# Altium PCB Board.PcbDoc
Units mm, origin at the board's own origin, x right, y up, seen from the top; angles counter-clockwise.
Board outline 9.99 x 10 mm, 2 copper layers (Top Layer, Bottom Layer), stack 1.271 mm thick; 8 components, 17 nets, 58 pads, 19 vias.
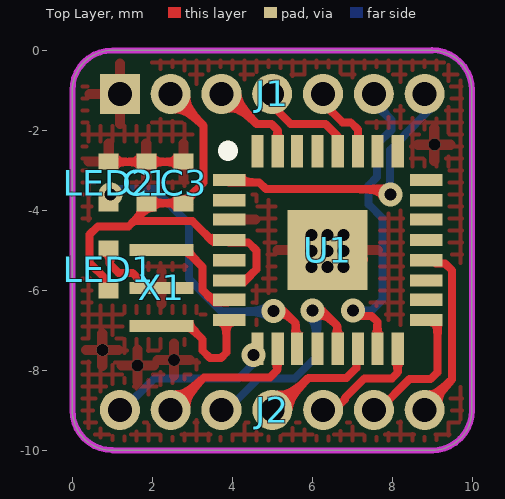
[diagram p0: Top Layer view]
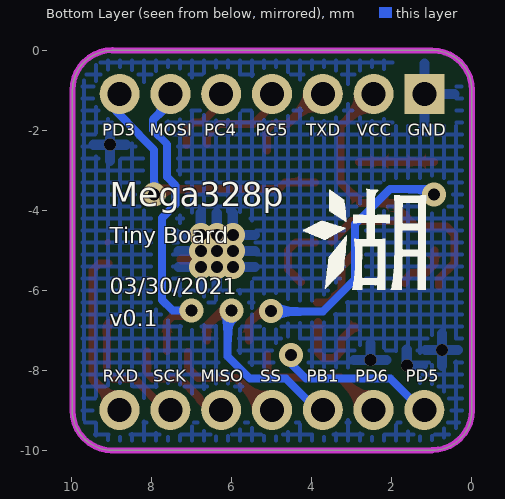
[diagram p1: Bottom Layer view, seen from below]

## Layer stack, top to bottom
Top Solder: solder mask 0.0102, Solder Resist, Dk 3.5
Top Layer: signal copper 0.0356
Dielectric 1: dielectric 1.2, FR-4, Dk 4.8
Bottom Layer: signal copper 0.0356
Bottom Solder: solder mask 0.0102, Solder Resist, Dk 3.5

## Board outline
1.001,-10.003 cw(c1.001,-9.003) 0.001,-9.003 0,-9.007 0,-1.013 0,-1 cw(c1,-1) 1,0 0.985,0 8.969,0 8.989,-0.001 cw(c8.989,-1.001) 9.989,-1.001 9.99,-1.012 9.99,-9.007 9.991,-8.999 cw(c8.991,-8.999) 8.991,-9.999 9.003,-10

## Design rules (kind name [scope] priority, off if disabled: settings)
Clearance [All] p1: gap=0.127 ignorepadtopadclearanceinfootprint=TRUE
HoleToHoleClearance [All] p1: gap=0.1 allowstackedmicrovias=TRUE
MinimumSolderMaskSliver [All] p1 off: minsoldermaskwidth=0.089
PolygonConnect [All] p1: connectstyle=Relief reliefconductorwidth=0.254 reliefentries=4 polygonreliefangle="90 Angle" airgapwidth=0.254
RoutingVias [All] p1: holewidth=0.711 width=1.27 viastyle="Through Hole" minholewidth=0.15 minwidth=0.328 maxholewidth=6.5 maxwidth=1.27
SilkToSolderMaskClearance [IsPad] p1 off: minsilkscreentomaskgap=0.254 clearancetoexposedcopper=TRUE
SolderMaskExpansion [All] p1: expansion=0.102
Width [All] p1: maxlimit=0.5 minlimit=0.102 preferedwidth=0.102 minimp=50.000000 maximp=50.000000 favimp=50.000000
27 further rules are at their usual default settings.

## Components (designator, comment, footprint, x,y, rotation, side; value= is the part's Value field where it differs from the comment)
C1 "100pF" C0402 1.85,-2.78 r270 top
C3 "100pF" C0402 2.78,-2.78 r270 top
J1 "BoardPinsLeft" CONNECTOR7G 1.188,-1.09 r0 top locked
J2 "BoardPinsRight" CONNECTOR7 8.81,-8.99 r180 top locked
LED1 "LED" LED0402 0.92,-6.005 r90 top
LED2 "LED" LED0402 0.92,-3.83 r90 top
U1 "Atmega328p" ATMEGA328P 3.888,-2.501 r0 top
X1 "16Mhz" CSTCE16M0V53-RO 2.23,-4.99 r270 top

## Footprints (in the part's own frame and the unit in brackets; to place one, negate y for a bottom-side part, rotate by r counter-clockwise, add the part's x,y. Pads: shape width x height; smd on the part's side, far side on the other; paste and mask are expansions set on the pad)
ATMEGA328P [mil]
  rect 32x12 smd: 1(1.19,-29.07) 2(1.19,-49.07) 3(1.19,-68.07) 4(1.19,-88.07) 5(1.19,-108.07) 6(1.19,-128.07) 7(1.19,-147.07) 8(1.19,-167.07) 17(195.19,-167.07) 18(195.19,-147.07) 19(195.19,-128.07) 20(195.19,-108.07) 21(195.19,-88.07) 22(195.19,-68.07) 23(195.19,-49.07) 24(195.19,-29.07)
  rect 12x32 smd: 9(29.19,-195.07) 10(49.19,-195.07) 11(68.19,-195.07) 12(88.19,-195.07) 13(108.19,-195.07) 14(128.19,-195.07) 15(147.19,-195.07) 16(167.19,-195.07) 25(167.19,-1.07) 26(147.19,-1.07) 27(128.19,-1.07) 28(108.19,-1.07) 29(88.19,-1.07) 30(68.19,-1.07) 31(49.19,-1.07) 32(29.19,-1.07)
  rect 78.74x78.74 smd: 33(98.19,-98.07)
  silkscreen extent 0,0 0,0, body extent 3,-198 200,-2, height 40
C0402 [mm]
  rect 0.4x0.5 smd: 1(0,0) 2(1.05,0)
  body extent 0,-0.47 1.04,0.27, height 1.2
CONNECTOR7 [mm]
  round 1 hole 0.6: 1(0,0) 2(1.27,0) 3(2.54,0) 4(3.81,0) 5(5.08,0) 6(6.35,0) 7(7.62,0)
  body extent -0.6,-0.58 8.22,0.59, height 0.77
CONNECTOR7G [mm]
  rect 1x1 hole 0.6: 1(0,0)
  round 1 hole 0.6: 2(1.27,0) 3(2.54,0) 4(3.81,0) 5(5.08,0) 6(6.35,0) 7(7.62,0)
  body extent -0.6,-0.58 8.22,0.59, height 0.77
CSTCE16M0V53-RO [mm]
  rect 0.3x1.6 smd: 1(0,0) 2(1.9,0) ""(0.95,0)
  body extent -0.65,-0.69 2.55,0.66, height 1.01
LED0402 [mm]
  rect 0.4x0.5 smd: 1(0,0.01) 2(1.05,0.01)
  body extent 0,-0.26 1.04,0.28, height 0.4

## Part data
C1 C3: library part Capacitor
X1: library part Crystal

## Via types
v1: diameter 0.6, hole 0.3, Top Layer to Bottom Layer, tented both sides, 15 vias
v2: diameter 0.3, hole 0.3, Top Layer to Bottom Layer, tented both sides, 4 vias

## Nets (pads, with @x,y where several pads share a name; then routed paths per layer and width w, separated by ;. In a path a pad name is that pad's centre, name@x,y a point inside that pad or via, vN(x,y) a via of type N, cw(c..) or ccw(c..) an arc to the next point about the centre after c; other vN are vias at no path point)
GND: C1.1 C3.1 J1.1 LED1.2 LED2.2 U1.3 U1.33 X1. | length 3.5
  Top Layer w0.2: LED1.2@0.94,-5 0.94,-5.35 1.16,-5.57 1.51,-5.57 1.67,-5.73 X1.@1.67,-5.82 ; LED2.2@0.95,-2.79 C3.1@2.82,-2.79
  Top Layer w0.25: U1.33@6.994,-5.232 U1.33@7.263,-5.232
  other v1: 5.98,-5.42 6.38,-5.42 6.78,-5.42 5.98,-5.02 6.38,-5.02 6.78,-5.02 5.98,-4.62 6.38,-4.62 6.78,-4.62
  other v2: 1.63,-7.88 2.54,-7.74 0.75,-7.49 9.05,-2.36
MISO: J2.3 U1.16 | length 2.5
  Top Layer w0.2: J2.3@6.53,-8.99 6.55,-8.99 6.813,-8.727 6.813,-8.689 7.302,-8.2 7.99,-8.2 8.13,-8.06 U1.16@8.13,-7.53
MOSI: J1.6 U1.15 | length 7.6
  Top Layer w0.2: v1@7.015,-6.5 7.155,-6.64 7.48,-6.64 7.627,-6.787 U1.15 U1.15@7.627,-7.516
  Bottom Layer w0.2: v1@7.11,-6.52 7.13,-6.5 7.49,-6.5 7.75,-6.24 7.75,-4.19 7.41,-3.85 7.41,-3.38 7.62,-3.17 7.62,-2.35 7.98,-1.99 7.98,-1.74 J1.6@7.64,-1.4
  other v1: 7.015,-6.509
PB1: J2.5 U1.13 | length 4.9
  Top Layer w0.2: v1@6.25,-6.51 6.62,-6.88 U1.13@6.62,-7.25
  Bottom Layer w0.2: J2.5@4,-9.02 4,-8.86 4.65,-8.21 5.55,-8.21 6.11,-7.65 6.11,-6.47 v1@6.12,-6.46 ; v1@6.1,-6.48 v1@6.1,-6.47
  other v1: 6.008,-6.509
PC4: J1.5 U1.27 | length 1.5
  Top Layer w0.2: J1.5@6.26,-1.33 6.282,-1.33 6.752,-1.8 6.96,-1.8 7.14,-1.98 U1.27@7.14,-2.37
PC5: J1.4 U1.28 | length 2.3
  Top Layer w0.2: J1.4@4.98,-1.24 4.98,-1.36 5.46,-1.84 6.33,-1.84 6.63,-2.14 U1.28@6.63,-2.34
PD3: J1.7 U1.1 | length 6.5
  Top Layer w0.2: U1.1@3.918,-3.299 4.669,-3.299 4.84,-3.47 7.72,-3.47 v1@7.83,-3.58
  Bottom Layer w0.2: v1@7.92,-3.58 7.94,-3.56 7.94,-3.312 7.947,-3.305 7.947,-2.485 8.307,-2.125 8.307,-2.113 J1.7@8.9,-1.52
  other v1: 7.95,-3.6
PD5: J2.7 U1.9 | length 4.1
  Top Layer w0.15: J2.7 J2.7@1.19,-8.82
  Bottom Layer w0.2: J2.7@1.28,-8.97 2.04,-8.21 4.15,-8.21 4.5,-7.86 v1@4.5,-7.57
  other v1: 4.53,-7.62
PD6: J2.6 U1.10 | length 3.4
  Top Layer w0.2: J2.6@2.49,-8.98 3.29,-8.18 4.94,-8.18 5.12,-8 U1.10@5.12,-7.61
PD7: LED2.1 U1.11 | length 7
  Top Layer w0.2: v1@5.3,-6.54 5.58,-6.82 U1.11@5.58,-7.26
  Bottom Layer w0.2: v1@0.92,-3.47 2.05,-3.47 2.92,-4.34 2.92,-5.72 3.73,-6.53 v1@5.05,-6.53
  other v1: 5.03,-6.52 0.95,-3.6
RX: J2.1 U1.20 | length 4.2
  Top Layer w0.2: J2.1@8.75,-8.97 9.49,-8.23 9.49,-5.5 9.32,-5.33 U1.20@9.09,-5.33
SCK: J2.2 U1.17 | length 3.2
  Top Layer w0.2: J2.2@7.55,-8.99 7.662,-8.99 8.432,-8.22 8.96,-8.22 9.13,-8.05 9.13,-6.862 U1.17@9.088,-6.82
SS: J2.4 U1.14 | length 3
  Top Layer w0.2: J2.4@4.99,-8.95 5.19,-8.75 J2.4@5.32,-8.75 ; J2.4@5.275,-8.815 5.9,-8.19 6.849,-8.19 7.1,-7.939 U1.14@7.1,-7.54
TX: J1.3 U1.31 | length 2.3
  Top Layer w0.2: J1.3@3.71,-1.12 3.89,-1.12 4.61,-1.84 4.98,-1.84 5.13,-1.99 U1.31@5.13,-2.51
VCC: C1.2 C3.2 J1.2 LED1.1 U1.4 U1.6 | length 10.9
  Top Layer w0.2: LED1.1@0.83,-5.89 0.83,-5.71 0.433,-5.313 0.433,-4.607 0.64,-4.4 1.41,-4.4 1.54,-4.27 3,-4.27 U1.4@3.515,-4.785 ; 1.57,-4.24 C1.2@1.885,-3.925 ; C1.2@1.95,-3.82 C3.2@2.8,-3.82 ; J1.2@2.58,-1.11 2.58,-1.19 3.285,-1.895 3.285,-3.305 C3.2@2.947,-3.643 ; U1.4@3.918,-4.798 4.398,-4.798 4.605,-5.005 4.605,-5.475 4.29,-5.79 U1.6@4.27,-5.79
XTAL1: U1.7 X1.1 | length 1.9
  Top Layer w0.2: X1.1@2.88,-5.04 3.257,-5.417 3.257,-5.994 3.573,-6.31 U1.7@3.88,-6.31
XTAL2: U1.8 X1.2 | length 2.2
  Top Layer w0.2: X1.2@2.94,-6.91 3.26,-7.23 3.26,-7.51 3.44,-7.69 3.72,-7.69 3.85,-7.56 U1.8@3.85,-6.79
pads on no net: U1.2 U1.5 U1.12 U1.18 U1.19 U1.21 U1.22 U1.23 U1.24 U1.25 U1.26 U1.29 U1.30 U1.32
copper on no net: | length 0
  Top Layer w0.15: 9.1,-4.79 9.11,-4.8

## Polygon pours and split planes (outlines as drawn)
GND on Top Layer "GND_L01_P004" (hatched 90Degree grid 0.3 track 0.1, remove dead copper, pour order 4): 9.83,-0.16 0.17,-0.16 0.16,-0.17 0.16,-9.84 9.83,-9.84
GND on Bottom Layer "GND_L02_P006" (hatched 90Degree grid 0.3 track 0.1, remove dead copper, pour order 6): 9.83,-0.16 9.825,-0.165 0.165,-0.165 0.165,-9.835 0.16,-9.84 9.83,-9.84

## Keep-outs
Keep-Out Layer:
  lines w0.15: -0.001,-0.999 cw(c0.999,-0.999) 0.999,0.001 ; 0,-0.979 0,-8.996 ccw(c1,-8.996) 1,-9.996 ; 0.999,-10 9.023,-10 ; 1.002,0 9,0 ; 8.988,-10.003 ccw(c8.988,-9.003) 9.988,-9.003 ; 8.99,0.005 cw(c8.99,-0.995) 9.99,-0.995 ; 9.99,-9.025 9.99,-0.946

## Silkscreen, mask and mechanical layers (free items; w line width, h text height)
Bottom Overlay:
  drawing of 5 lines, arcs and shapes, not listed
  text "GND" at 1.61,-2.14 h0.3
  text "VCC" at 2.88,-2.14 h0.3
  text "TXD" at 4.14,-2.14 h0.3
  text "PC5" at 5.41,-2.14 h0.3
  text "PC4" at 6.69,-2.14 h0.3
  text "MOSI" at 8.06,-2.14 h0.3
  text "PD3" at 9.24,-2.14 h0.3
  text "Mega328p" at 9.06,-3.9 h0.6
  text "Tiny Board" at 9.06,-4.82 h0.4
  text "03/30/2021" at 9.06,-6.1 h0.4
  text "v0.1" at 9.06,-6.9 h0.4
  text "PD5" at 1.65,-8.28 h0.3
  text "PD6" at 2.913,-8.28 h0.3
  text "PB1" at 4.127,-8.28 h0.3
  text "SS" at 5.29,-8.28 h0.3
  text "MISO" at 6.783,-8.28 h0.3
  text "SCK" at 7.967,-8.28 h0.3
  text "RXD" at 9.23,-8.28 h0.3
Mechanical 1:
  lines w0.15: 0,-9.007 0,-1.013 ; 0,-1 cw(c1,-1) 1,0 ; 0.001,-9.003 ccw(c1.001,-9.003) 1.001,-10.003 ; 0.976,-10 9.003,-10 ; 0.985,0 8.969,0 ; 8.989,-0.001 cw(c8.989,-1.001) 9.989,-1.001 ; 8.991,-9.999 ccw(c8.991,-8.999) 9.991,-8.999 ; 9.99,-9.007 9.99,-1.012